# Altium PCB 项目-6层核心板.PcbDoc (part 2 of 3)
Units mil, origin at the board's own origin, x right, y up, seen from the top; angles counter-clockwise.
Board outline 2165.35 x 1574.8 mil, 6 copper layers (TOP, GND02, ART03, ART04, PWR05, BOTTOM); 172 components, 0 nets, 834 pads, 541 vias.
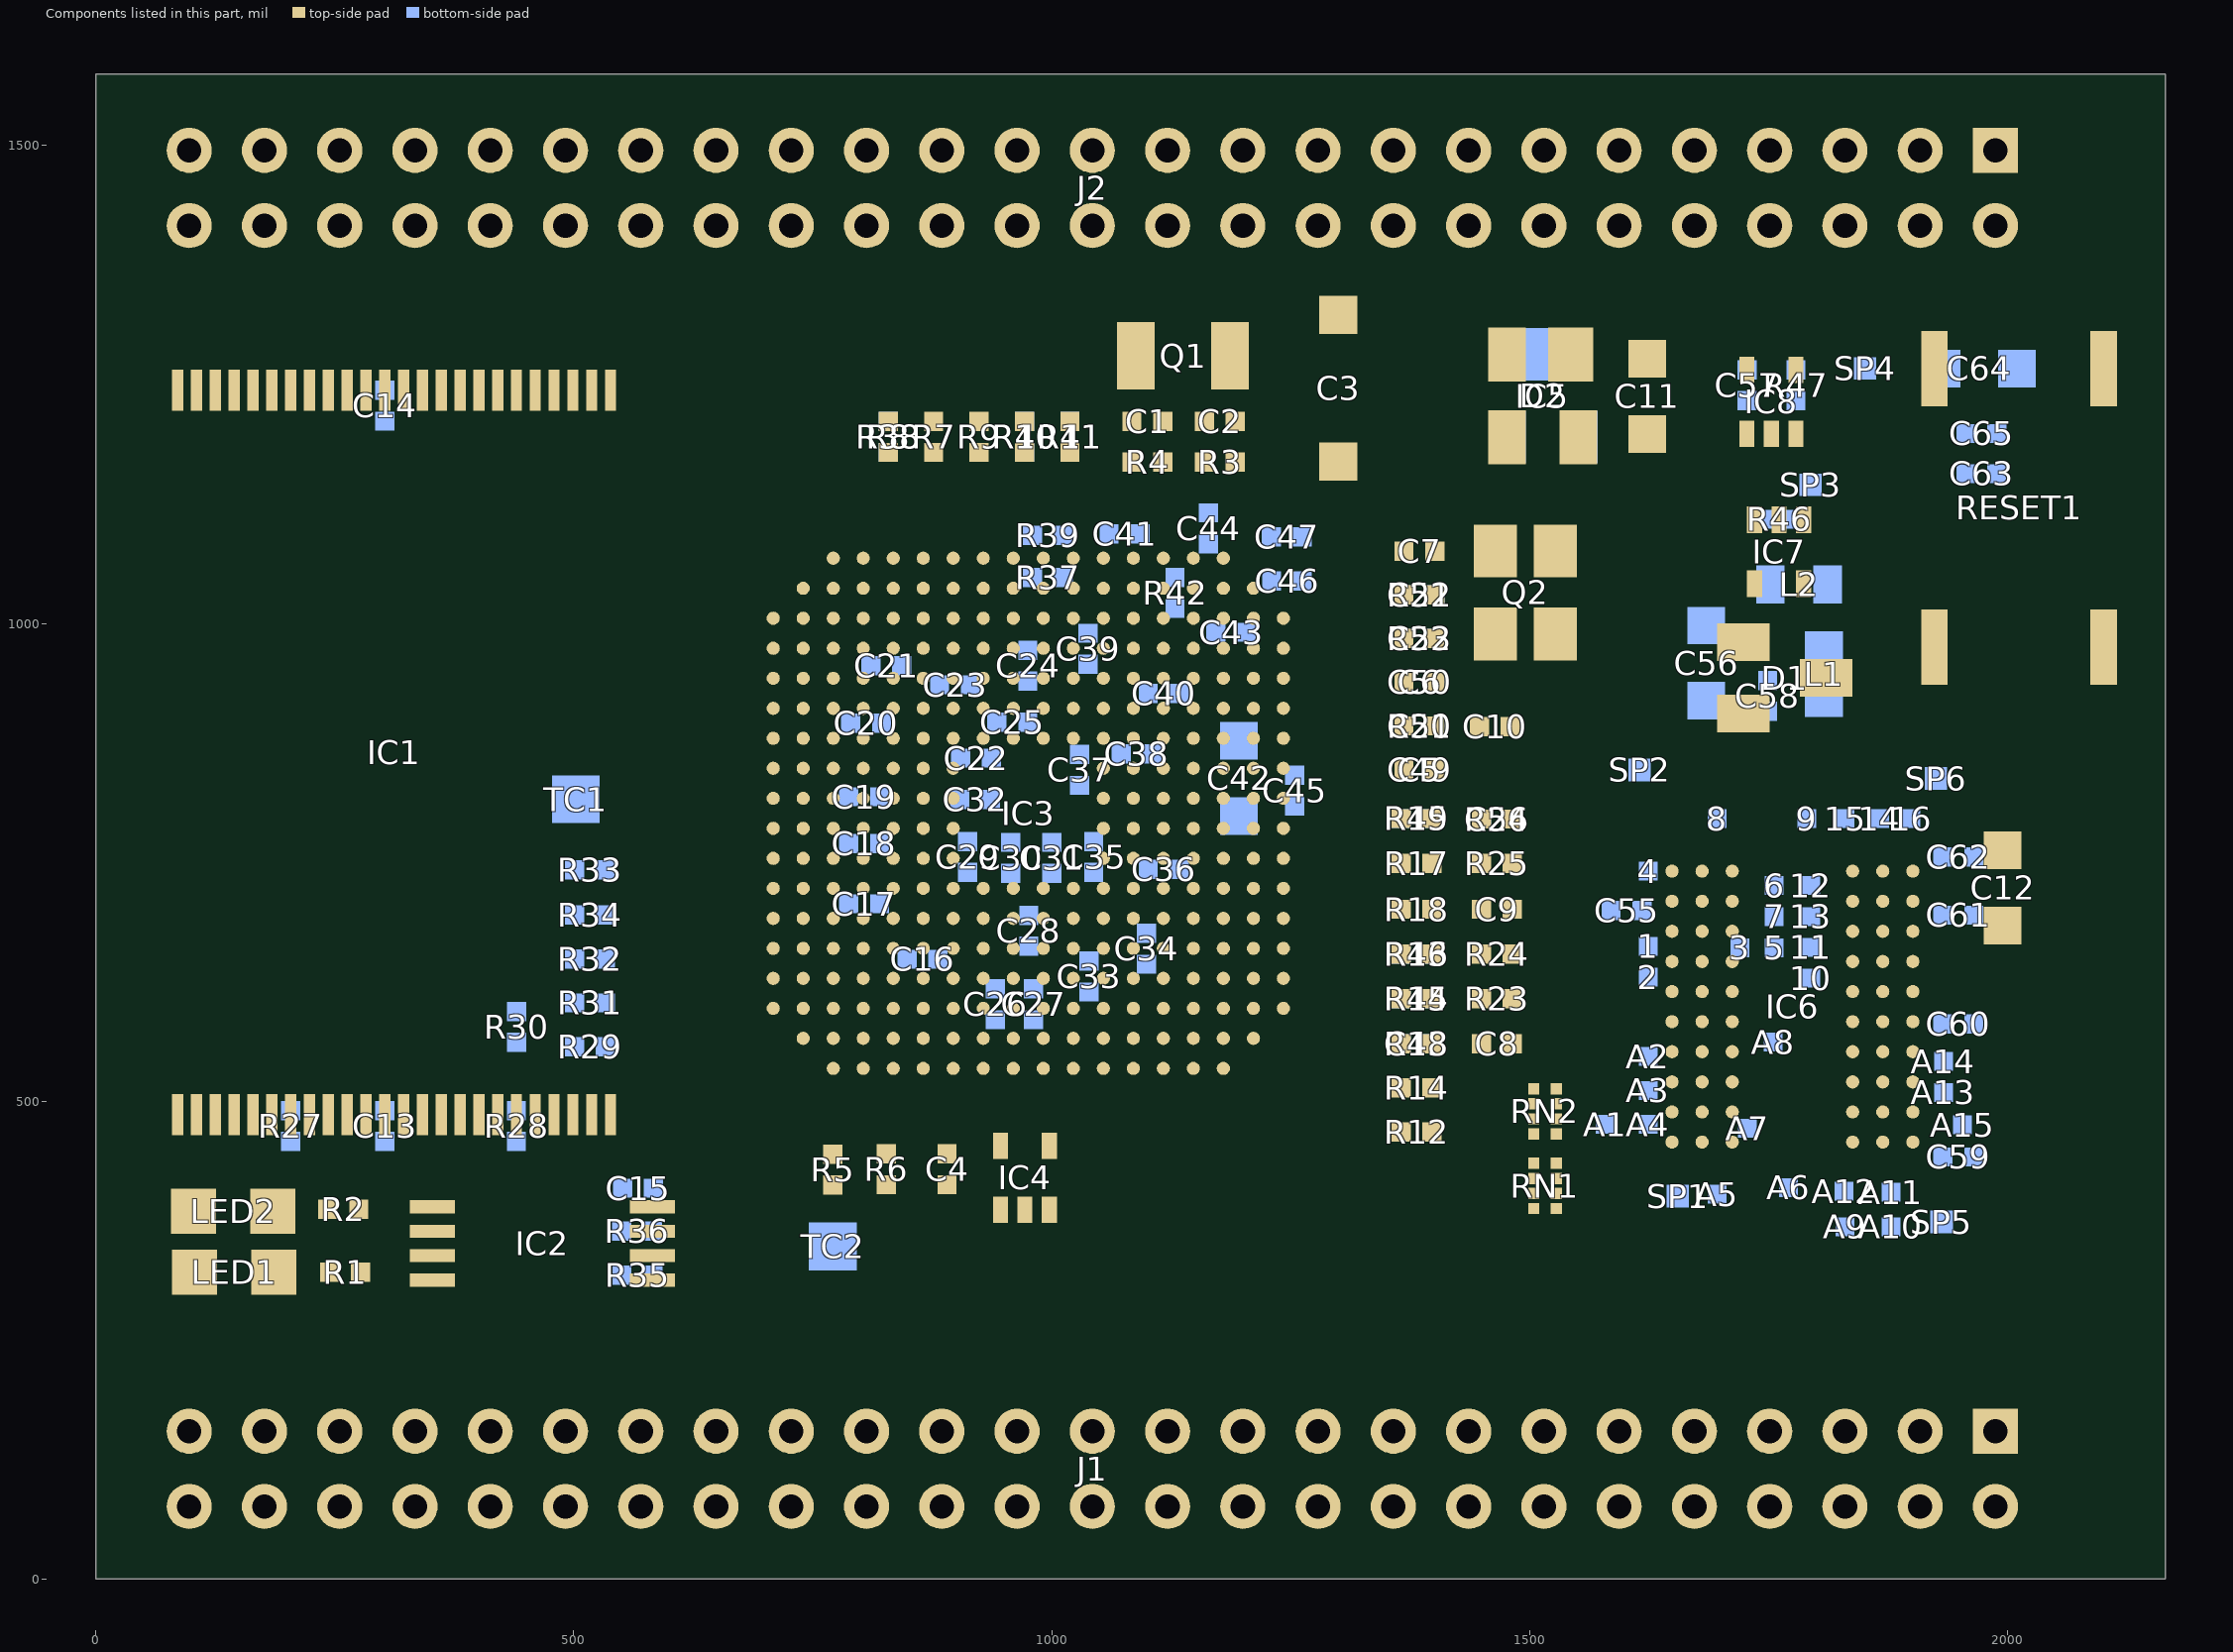
[diagram p6: the components of this part, seen from the top]

## Via types
v1: diameter 16, hole 8, TOP to BOTTOM, tented both sides, 541 vias

## Nets (pads, with @x,y where several pads share a name; then routed paths per layer and width w, separated by ;. In a path a pad name is that pad's centre, name@x,y a point inside that pad or via, vN(x,y) a via of type N, cw(c..) or ccw(c..) an arc to the next point about the centre after c; other vN are vias at no path point) (continued)
copper on no net: | length 160065.2
  TOP w5: v1(1330,664) 1337.48,671.48 1348.13,671.48 1365.56,654.06 ; v1(1330,693) 1330.48,693 1340,683.48 1348.13,683.48 1365.56,700.91 ; 1397.84,654.06 1412.79,669 v1(1423,669) ; v1(1423,700.91) 1449.56,700.91 1449.56,654.06 1449.56,607.2 1449.56,560.34
  TOP w5.7: v1(125.01,1073.73) 265.01,1073.73 400.58,1209.3 400.58,1243.94 ; v1(126.01,1120.73) 164.37,1159.09 164.37,1243.94 ; 184.05,1243.94 184.05,1204.92 v1(184.1,1204.87) ; 194,382 199,387 ; 196,326 201,321 ; v1(203.69,555.14) 223.42,535.41 223.42,486.07 ; 203.73,486.07 203.73,525.09 v1(203.78,525.14) ; 203.74,1243.94 203.74,1140 v1(223.01,1120.73) ; 223.42,1243.94 223.42,1204.92 v1(223.47,1204.87) ; 243.1,486.07 243.1,547.82 v1(285.01,589.73) ; v1(315.01,1084.87) 333.87,1103.73 352.01,1103.73 439.96,1191.68 439.96,1243.94 ; v1(316.01,1048.73) 459.64,1192.36 459.64,1243.94 ; v1(350.32,1124.87) 420.27,1194.82 420.27,1243.94 ; v1(365.01,525.73) 376.01,525.73 380.9,520.84 380.9,486.07 ; 400.58,486.07 v1(400.63,525.14) v1(400.63,525.14) ; v1(411.01,426.73) 420.27,435.99 420.27,486.07 ; 439.95,486.07 v1(440,525.14) v1(440,525.14) ; 582.31,312.82 820.69,312.82 v1@821.18,312.33 ; 582.31,338.41 v1(818.15,338.41) v1@818.24,338.5 ; 582.31,364 625.82,364 v1(626,364.18) ; v1(598.7,926.9) 614.4,942.6 708.6,942.6 ; v1(630.1,644.3) 692.9,644.3 708.6,660 ; v1(630.1,707.1) 645.8,722.8 708.6,722.8 ; v1(630.1,926.9) 692.9,926.9 708.6,911.2 ; v1(661.5,707.1) 724.3,707.1 740,722.8 ; v1(661.5,769.9) 692.9,801.3 755.7,801.3 771.4,785.6 ; v1(661.5,864.1) 677.2,879.8 708.6,879.8 ; v1@692.9,455.9 771.4,534.4 ; v1(692.9,581.5) 708.6,597.2 ; v1(692.9,612.9) 755.7,612.9 771.4,628.6 ; v1(692.9,675.7) 708.6,691.4 ; v1(692.9,769.9) 708.6,754.2 ; v1(692.9,864.1) 708.6,848.4 ; v1(692.9,989.7) 708.6,974 ; v1(692.9,1021.1) 708.6,1005.4 ; v1(724.3,455.9) 767.13,498.73 794.01,498.73 802.8,507.52 802.8,534.4 ; v1(724.3,518.7) 771.4,565.8 ; v1(724.3,581.5) 740,597.2 ; v1(724.3,675.7) 740,691.4 ; v1(724.3,738.5) 740,754.2 ; v1(724.3,769.9) 740,785.6 ; v1(724.3,832.7) 740,817 ; v1(724.3,864.1) 740,848.4 ; v1(724.3,958.3) 740,942.6 ; v1(724.3,989.7) 740,974 ; v1(724.3,1115.3) 724.3,1021.1 740,1005.4 ; v1(755.7,581.5) 771.4,597.2 ; v1(755.7,644.3) 771.4,660 ; v1(755.7,675.7) 771.4,691.4 ; v1(755.7,738.5) 771.4,754.2 ; v1(755.7,832.7) 771.4,817 ; v1(755.7,864.1) 771.4,848.4 ; v1(755.7,895.5) 771.4,879.8 ; v1(755.7,958.3) 771.4,942.6 ; v1(755.7,989.7) 771.4,974 ; v1(755.7,1021.1) 771.4,1005.4 ; v1(755.7,1115.3) 755.7,1052.5 771.4,1036.8 ; v1@755.7,1146.7 771.4,1131 771.4,1068.2 ; v1(771,385.74) 771,412.32 ; 771,444.6 v1(803.12,444.6) ; 771.4,911.2 v1(787.1,926.9) ; v1(787.1,518.7) 787.1,550.1 802.8,565.8 ; v1(787.1,581.5) 802.8,597.2 ; v1(787.1,612.9) 802.8,628.6 ; v1(787.1,644.3) 802.8,660 ; v1(787.1,675.7) 802.8,691.4 ; v1(787.1,738.5) 802.8,754.2 ; v1(787.1,864.1) 802.8,879.8 ; v1(787.1,1021.1) 802.8,1005.4 ; v1(787.1,1115.3) 787.1,1052.5 802.8,1036.8 ; v1(787.1,1151) 802.8,1135.3 802.8,1131 802.8,1068.2 ; 802.8,785.6 818.5,801.3 v1(849.9,801.3) ; v1(818.5,550.1) 834.2,565.8 ; v1(818.5,581.5) 834.2,597.2 ; v1(818.5,612.9) 834.2,628.6 ; v1(818.5,644.3) 834.2,660 ; v1(818.5,675.7) 834.2,691.4 ; v1(818.5,864.1) 834.2,848.4 ; v1(818.5,926.9) 834.2,911.2 ; v1(818.5,1021.1) 834.2,1005.4 ; v1(818.5,1052.5) 834.2,1036.8 ; v1(818.5,1083.9) 834.2,1068.2 ; 827,445 v1(827.01,476.73) ; v1(829,1151) 829,1179 ; 834.2,534.4 865.6,503 v1(897,503) ; v1(849.9,550.1) 865.6,565.8 ; v1(849.9,581.5) 865.6,597.2 ; v1(849.9,612.9) 865.6,628.6 ; v1(849.9,1021.1) 865.6,1005.4 ; v1(849.9,1052.5) 865.6,1036.8 ; v1(849.9,1083.9) 865.6,1068.2 ; 865.6,534.4 881.3,518.7 912.7,518.7 v1(928.4,503) ; v1(876.5,1151) 876.5,1179 ; 876.5,1211.28 v1(876.5,1239.28) ; v1(881.3,550.1) 897,565.8 ; v1(881.3,581.5) 897,597.2 ; v1(881.3,612.9) 897,628.6 ; v1(881.3,895.5) 897,911.2 ; v1(881.3,958.3) 897,942.6 ; v1(881.3,989.7) 897,974 ; v1(881.3,1021.1) 897,1005.4 ; v1(881.3,1115.3) 881.3,1083.9 897,1068.2 ; v1(912.7,550.1) 928.4,565.8 ; v1(912.7,581.5) 928.4,597.2 ; v1(912.7,612.9) 928.4,628.6 ; v1(912.7,958.3) 928.4,942.6 ; v1(912.7,989.7) 928.4,974 ; v1(912.7,1083.9) 912.7,1052.5 928.4,1036.8 ; v1(924,1115.3) 924,1104 928.4,1099.6 928.4,1068.2 ; v1@924,1151 v1(924,1154) 924,1179 ; 924,1211.28 v1(924,1239.28) ; v1(944.1,958.3) 959.8,942.6 ; v1(944.1,989.7) 959.8,974 ; v1(944.1,1021.1) 959.8,1005.4 ; v1(944.1,1052.5) 959.8,1036.8 ; v1(944.1,1083.9) 959.8,1068.2 ; v1@971.5,1151 v1(971.5,1154) 971.5,1179 ; 991.2,942.6 v1(1006.9,958.3) ; 991.2,974 v1(1006.9,989.7) ; 991.2,1005.4 v1(1006.9,1021.1) ; v1(1006.9,612.9) 1022.6,628.6 ; v1@1019,1151 v1(1019,1154) 1019,1179 ; 1022.6,597.2 v1(1038.3,581.5) ; 1054,534.4 v1(1069.7,518.7) ; 1054,565.8 v1(1069.7,550.1) ; 1054,597.2 v1(1069.7,581.5) ; 1054,628.6 v1(1069.7,612.9) ; 1054,942.6 1069.7,958.3 v1(1069.7,989.7) ; 1054,1005.4 v1(1069.7,1021.1) ; v1(1069.7,1052.5) 1085.4,1036.8 ; 1083.86,1169 1083.86,1211.28 1088.15,1215.58 1088.15,1280 1088.15,1263.15 ; 1085.4,534.4 v1(1101.1,518.7) ; 1085.4,565.8 v1(1101.1,550.1) ; 1085.4,597.2 v1(1101.1,581.5) ; 1085.4,628.6 v1(1101.1,612.9) ; 1085.4,942.6 v1(1101.1,958.3) ; 1085.4,1005.4 v1(1101.1,1021.1) ; 1116.14,1169 1130,1155.14 1130,1128 1101.1,1099.1 1101.1,1052.5 1116.8,1036.8 ; 1116.8,534.4 v1(1132.5,518.7) ; 1116.8,565.8 v1(1132.5,550.1) ; 1116.8,597.2 v1(1132.5,581.5) ; 1116.8,628.6 v1(1132.5,612.9) ; 1116.8,1005.4 1132.5,1021.1 1132.5,1081.5 1148,1097 1148,1157.14 1159.86,1169 ; v1(1132.5,675.7) 1148.2,691.4 ; 1148.2,534.4 v1(1163.9,518.7) ; 1148.2,565.8 v1(1163.9,550.1) ; 1148.2,597.2 v1(1163.9,581.5) ; 1148.2,628.6 v1(1163.9,612.9) ; 1148.2,660 v1(1163.9,644.3) ; 1148.2,722.8 v1(1163.9,707.1) ; 1148.2,754.2 v1(1163.9,738.5) ; 1148.2,785.6 1163.9,801.3 v1@1336.01,801.3 ; 1148.2,911.2 v1(1163.9,926.9) ; 1148.2,942.6 v1(1163.9,958.3) ; 1148.2,974 1163.9,989.7 1362.97,989.7 1368.5,984.17 ; v1(1163.9,675.7) 1179.6,660 ; 1179.6,565.8 v1(1195.3,550.1) ; 1179.6,597.2 v1(1195.3,612.9) ; 1179.6,691.4 v1(1195.3,675.7) ; 1179.6,722.8 v1(1195.3,707.1) ; 1179.6,754.2 v1(1195.3,738.5) ; 1179.6,942.6 v1(1195.3,926.9) ; 1179.6,1036.8 1200.8,1058 1251,1058 1305,1004 1342.6,1004 1368.5,1029.9 ; 1186.58,1280 1192.14,1274.44 1192.14,1211.28 1192.14,1169.23 ; 1192.14,1169 1192.14,1169.23 ; 1211.01,597.2 1220.54,597.2 1242.42,575.32 1242.42,488.58 1263.12,467.88 1365.56,467.88 ; 1211.01,628.6 v1(1226.71,612.9) ; 1211.01,660 v1(1226.71,644.3) ; 1211.01,691.4 v1(1226.71,675.7) ; 1211.01,722.8 v1(1226.71,707.1) ; 1211.01,754.2 v1(1226.71,738.5) ; 1211.01,974 v1(1226.71,958.3) ; 1211.01,1005.4 v1(1226.71,1021.1) ; v1(1226.98,770.18) 1242.4,785.6 1242.68,785.88 ; 1242.4,597.2 v1(1258.1,581.5) ; 1242.4,628.6 1288.14,628.6 1296.01,620.73 1296.01,593.73 1292.01,589.73 1284.01,589.73 1278.01,595.73 1278.01,605.73 1270.84,612.9 v1(1258.1,612.9) ; 1242.4,660 v1(1258.1,644.3) ; 1242.4,691.4 v1(1258.1,675.7) ; 1242.4,722.8 v1(1258.1,707.1) ; 1242.4,754.2 1276.55,720.05 1276.55,673.19 1315.01,634.73 1315.01,540.99 1342.12,513.88 1365.56,513.88 ; 1242.4,1005.4 v1(1258.1,1021.1) ; 1300,1169.23 1192.14,1169.23 ; v1(1339,893) 1339.28,892.72 1368.5,892.72 1368.5,847 ; 1365.56,560.34 1365.56,607.2 ; 1365.56,748.97 1365.56,795.83 ; 1397.84,467.88 1427.39,497.43 v1(1427.39,514.01) ; 1397.84,513.88 1397.84,560.34 v1(1397.84,583.73) ; 1397.84,607.2 v1(1420.88,630.24) ; 1397.84,700.91 v1(1423,700.91) ; 1397.84,748.97 v1(1424.01,748.97) 1447.82,748.97 ; 1397.84,795.83 1448.96,795.83 ; 1400.78,892.72 1446.83,892.72 1447.56,892 ; 1400.78,938.45 1400.78,985.78 1427,1012 1427,1022 1439,1034 1488,1034 1527,995 1527,989.01 ; 1400.78,1029.9 1400.78,1075.62 1464.01,1075.62 ; v1@1427.26,513.88 v1(1427.39,514.01) ; v1@1428.11,514.73 v1(1427.39,514.01) ; 1449.56,795.23 v1@1449.56,822.18 ; v1(1456.01,403.3) 1471.49,387.82 1504.34,387.82 ; v1(1456.01,434.79) 1471.49,419.31 1504.34,419.31 ; 1476.2,1281.31 1476.2,1320.2 1484,1328 v1(1514,1328) ; 1481.84,747.23 1481.84,748.97 1481.84,723.9 1486.01,719.73 1525.01,719.73 1535.01,709.73 1535.01,662.7 1530.59,658.28 1507.43,658.28 1503.01,653.86 1503.01,645.01 1507.43,640.58 1530.59,640.58 1535.01,636.16 1535.01,597.73 1547.01,585.73 1564.01,585.73 1574.01,595.73 1574.01,612.16 1569.59,616.58 1558.43,616.58 1554.01,621.01 1554.01,629.86 1558.43,634.28 1569.59,634.28 1574.01,638.7 1574.01,647.55 1569.59,651.98 1558.43,651.98 1554.01,656.41 1554.01,665.26 1558.43,669.68 1569.59,669.68 1574.01,674.11 1574.01,682.95 1569.59,687.38 1558.43,687.38 1554.01,691.8 1554.01,700.66 1558.43,705.08 1569.59,705.08 1574.01,709.51 1574.01,724.16 1569.59,728.58 1538.43,728.58 1534.01,733.01 1534.01,741.86 1538.43,746.28 1569.59,746.28 1574.01,750.7 1574.01,762.55 1569.59,766.98 ; 1481.84,795.23 1468.01,809.06 1468.01,837.73 1476.01,845.73 1502.03,845.73 1506.46,841.3 1506.46,804.16 1510.89,799.73 1519.74,799.73 1524.16,804.16 1524.16,841.3 1528.59,845.73 1541.01,845.73 1549.01,837.73 1549.01,817.73 1567.01,799.73 1567.01,792.73 1558.96,784.68 1508.43,784.68 1504.01,780.26 1504.01,771.41 1508.43,766.98 1569.59,766.98 ; v1(1484.01,403.3) 1484.28,403.57 1504.34,403.57 ; v1(1484.01,434.79) 1484.28,435.06 1504.34,435.06 ; v1(1484.01,468.01) 1484.01,489.73 1491.59,497.31 1504.34,497.31 ; v1@1484.28,513.06 1504.34,513.06 ; 1527.96,387.82 1560.81,387.82 v1(1576.29,403.3) ; 1527.96,403.57 v1@1548.02,403.57 ; 1527.96,419.31 1560.81,419.31 v1(1576.29,434.79) ; 1527.96,435.06 v1@1548.02,435.06 ; 1527.96,497.31 1580.59,497.31 1595.01,511.73 1595.01,548.84 v1(1576.29,567.56) ; 1527.96,513.06 1542.01,513.06 1548.02,519.07 1548.02,567.29 v1(1548.29,567.56) ; 1538.43,766.98 1569.59,766.98 ; v1(1566.01,822.73) 1587.01,801.73 1587.01,759.3 1591.43,754.88 1596.59,754.88 1601.01,750.45 1601.01,741.61 1596.59,737.18 1591.43,737.18 1587.01,732.76 1587.01,636.73 1626.01,597.73 1663.44,597.73 1680.51,614.8 ; 1649.01,488.82 v1(1664.76,473.07) ; 1649.01,520.32 1638.6,530.73 1627.01,530.73 1622.01,525.73 1622.01,507.73 1626.01,503.73 1663.92,503.73 v1(1664.76,504.57) ; 1649.01,551.81 v1(1664.76,536.06) ; v1(1664.76,630.55) 1680.51,646.3 ; 1680.51,457.32 v1(1696.26,441.57) ; 1680.51,488.82 v1(1696.26,473.07) ; 1680.51,520.32 v1(1696.26,504.57) ; 1680.51,551.81 v1(1696.26,536.06) ; 1680.51,583.31 v1(1696.26,567.56) ; 1680.51,677.8 1670.08,677.8 1664.01,671.73 1664.01,664.73 1668.01,660.73 1691.01,660.73 1696.26,665.98 v1(1696.26,693.54) ; 1680.51,709.29 v1(1696.26,725.03) ; 1680.51,740.79 1680.51,766.23 1673.01,773.73 1615.01,773.73 1609.01,779.73 1609.01,809.73 1616.01,816.73 1631.64,816.73 1636.06,812.3 1636.06,796.18 1640.49,791.76 1649.34,791.76 1653.76,796.18 1653.76,812.3 1658.18,816.73 1667.03,816.73 1671.46,812.3 1671.46,796.18 1675.89,791.76 1684.74,791.76 1689.16,796.18 1689.16,812.3 1693.59,816.73 1698.01,816.73 1704.01,816.73 1711.01,809.73 1711.01,771.29 v1(1696.26,756.53) ; 1712.01,457.32 1712.01,430.73 1706.01,424.73 1691.01,424.73 1684.01,417.73 1684.01,383.73 1689.01,378.73 1709.43,378.73 1713.86,383.16 1713.86,408.3 1718.28,412.73 1727.14,412.73 1731.56,408.3 1731.56,383.16 1735.99,378.73 1750.01,378.73 1754.01,382.73 1754.01,427.73 1740.17,441.57 v1(1727.76,441.57) ; 1712.01,488.82 1719.05,481.77 ; 1712.01,520.32 v1(1727.76,504.57) ; 1712.01,551.81 v1(1727.76,536.06) ; 1712.01,614.8 1712.01,604.73 1720.01,596.73 1745.01,596.73 1754.01,587.73 1754.01,580.73 1748.01,574.73 1734.01,574.73 1729.01,569.73 1729.01,560.73 1735.01,554.73 1770.01,554.73 1776.01,560.73 1776.01,604.73 1768.23,612.51 1745.79,612.51 v1(1727.76,630.54) ; 1712.01,646.3 1743.51,646.3 v1(1759.26,630.54) ; 1712.01,677.8 v1(1727.76,693.54) ; 1712.01,709.29 v1(1727.76,725.03) ; 1727.41,1198.53 1728.01,1197.93 v1(1728.01,1162.73) ; 1727.76,473.07 1719.05,481.77 ; v1@1734,1071.01 1734,1042.95 1735.41,1041.54 ; v1@1771.01,389.73 1771.01,429.82 1719.05,481.77 ; 1778.59,1265.46 1778.59,1298.59 v1(1779,1299) ; 1786.59,1108.47 v1(1857.01,1108.47) 1899.53,1108.47 1923.42,1084.58 1923.42,975.33 2100.58,975.33 ; v1(1790.74,756.53) 1804.01,743.27 1804.01,721.11 1799.59,716.68 1794.9,716.68 1790.48,712.26 1790.48,703.41 1794.9,698.98 1799.59,698.98 1804.01,694.55 1804.01,685.7 1799.59,681.28 1794.9,681.28 1790.48,676.86 1790.48,668.01 1794.9,663.58 1799.59,663.58 1804.01,659.16 1804.01,622.73 1811.94,614.8 1837.99,614.8 ; v1(1822.24,441.57) 1819.85,441.57 1806.01,427.73 1806.01,417.73 1815.01,408.73 1833.01,408.73 1837.99,413.71 1837.99,457.32 ; v1(1822.24,473.07) 1801.9,452.73 1787.01,452.73 1775.01,464.73 1775.01,482.73 1781.1,488.82 1837.99,488.82 ; v1(1822.24,504.57) 1837.99,520.32 ; v1(1822.24,536.06) 1837.99,551.81 ; v1(1822.24,662.04) 1837.99,646.3 ; v1(1822.24,693.54) 1837.99,677.8 ; v1(1822.24,725.03) 1837.99,709.29 ; v1(1853.74,441.57) 1869.49,457.32 ; v1(1853.74,473.07) 1869.49,488.82 ; v1(1853.74,504.57) 1869.49,520.32 ; v1(1853.74,536.06) 1869.49,551.81 ; v1(1853.74,567.56) 1869.49,583.31 ; v1(1853.74,630.54) 1869.49,614.8 ; v1(1853.74,662.04) 1869.49,646.3 ; v1(1853.74,693.54) 1869.49,677.8 ; v1(1853.74,725.03) 1869.49,709.29 ; 1869.49,740.79 v1(1885.24,725.04) ; v1(1885.23,504.57) 1900.98,520.32 ; v1(1885.23,536.06) 1900.98,551.81 ; 1900.98,488.82 v1(1916.73,473.07)
  TOP w10: v1@102,429 v1(102.32,428.68) 102.32,385 103.32,384 103.32,321 v1(103.32,272.68) v1@104,272 ; v1@274,357 v1(275,358) 275,387 ; v1(277,292) 277,321 ; v1(285,524.14) 297,524.14 302.16,518.98 302.16,486.07 ; 302.16,1243.94 302.16,1284.16 v1(303,1285) ; v1(302.43,426.14) 321.84,445.55 321.84,486.07 ; 321.84,1243.94 321.84,1273.84 v1(334,1286) ; 352,312.82 v1(394,312.82) 394,331.82 387.41,338.41 352,338.41 ; 352,364 v1(394,364) 394,383 387.41,389.59 352,389.59 ; 582.31,389.59 613.59,389.59 v1(626,402) ; v1(801,1211) 801.28,1211.28 829,1211.28 ; 827,412.72 v1(856.01,412.72) 890.49,412.72 892.5,414.73 991.01,414.73 997.59,408.15 997.59,386.53 ; 890.49,445 937.95,445 946.41,453.46 ; v1@972,1240 v1(971.5,1239.5) 971.5,1211.28 1019,1211.28 ; 1083.01,1091.73 1083.01,1125.99 v1(1055,1154) v1(1055,1270.73) 1055,1325 1069,1339 1210,1339 1223,1326 v1(1223,1271) v1(1223,1216) ; 1116.14,1211.28 1159.86,1211.28 ; 1116.8,1068.2 1116.8,1090.8 v1(1117,1091) ; 1148.2,1068.2 1165,1085 1165,1109 ; v1(1223,1196) v1(1223,1216) ; v1(1265,974) v1(1313,974) 1332.95,974 1368.5,938.45 1368.5,933.5 1385,917 1449,917 v1(1464.01,932.01) ; v1(1300,1279) 1300,1322.77 ; 1400.78,847 v1(1430,847) ; v1@1435,1194 v1(1435.69,1194.69) 1476.2,1194.69 ; 1464.01,989.01 v1(1464.01,932.01) ; v1(1476.89,1153.49) 1476.2,1154.18 1476.2,1194.69 ; 1479.84,892 v1(1512,892) ; 1481.84,560.34 1481.84,607.2 ; 1481.84,654.06 1481.84,700.91 1517.88,700.91 v1(1518.01,700.79) ; 1543.13,1281.31 1555,1293.18 v1(1555,1328) ; 1551,1194.69 1476.2,1194.69 ; 1648.41,614.2 1649.01,614.8 1630.94,614.8 1607.01,638.73 1607.01,698.79 1649.01,740.79 v1(1664.76,756.53) ; 1649.01,457.32 v1(1664.76,441.57) ; 1649.01,583.31 v1(1664.76,567.56) ; 1649.01,646.3 1634.44,646.3 1625.01,655.73 1625.01,684.73 1649.01,708.73 1649.01,709.29 v1(1664.76,725.03) ; 1649.01,677.8 v1(1664.76,693.54) ; 1712.01,740.79 v1(1727.76,756.53) ; 1727.41,1265.46 v1(1727.41,1298.41) v1@1728,1299 ; 1753,1198.53 1778.59,1198.53 v1(1811.53,1198.53) v1@1812,1199 ; 1761,1108.47 v1(1761,1145) ; v1(1822.24,756.53) 1837.99,740.79 ; v1(1885.23,473.06) 1900.98,457.32 ; v1(1885.23,567.56) 1900.98,583.31 ; v1(1885.23,630.54) 1900.98,614.8 ; v1(1885.23,662.04) 1900.98,646.3 ; v1(1885.23,693.54) 1900.98,677.8 ; v1(1885.23,756.53) 1900.98,740.79 ; 1900.98,709.29 v1(1916.73,725.03) ; 1923.42,1266.67 1961.67,1266.67 v1(1962,1267) ; 1165,1109 1165,1131 v1(1174,1140) 1230,1140 1239,1131 1329,1131 1347,1149 1347,1195 v1(1326,1216) v1(1223,1216) ; 1165,1109 1202,1109 1236,1075 1261,1075 1308,1028 v1(1308,1026) 1337,1026 v1(1339,1028) v1(1339,1075.62) 1368.5,1075.62 1368.5,1104.5 v1(1392,1128) v1(1509,1128) 1527,1110 1527,1075.62 1527.38,1076 v1(1573,1076) 1573,958 1547.01,932.01 v1(1464.01,932.01)
  TOP w12: 1085.4,879.8 v1(1101.1,895.5) 1085.4,911.2
  TOP w13.78: v1(849.9,707.1) 865.6,722.8 v1(849.9,738.5) 865.6,754.2 v1(849.9,769.9) 865.6,785.6 ; v1(849.9,895.5) 865.6,879.8 v1(849.9,864.1) 865.6,848.4 v1(849.9,832.7) 865.6,817 881.3,801.3 897,817 ; v1(849.9,926.9) 865.6,911.2 ; 865.6,660 v1(849.9,675.7) 865.6,691.4 ; v1(881.3,675.7) 897,660 912.7,644.3 928.4,660 ; v1(881.3,707.1) 897,722.8 ; v1(881.3,738.5) 897,754.2 ; v1(881.3,769.9) 897,785.6 ; v1(881.3,832.7) 897,848.4 ; 897,691.4 v1(912.7,675.7) 928.4,691.4 944.1,675.7 959.8,660 v1(944.1,644.3) ; 897,879.8 v1(912.7,895.5) 928.4,879.8 ; v1(912.7,707.1) 928.4,722.8 ; 928.4,911.2 v1(944.1,926.9) 959.8,911.2 ; v1(944.1,707.1) 959.8,722.8 ; 959.8,691.4 974.71,706.31 ; 959.8,879.8 v1(975.5,864.1) ; 991.2,660 v1(1006.9,644.3) 1022.6,660 ; 991.2,879.8 v1(1006.9,895.5) 991.2,911.2 v1(1006.9,926.9) 1022.6,942.6 ; 1022.6,722.8 v1(1038.3,707.1) ; 1022.6,879.8 v1(1038.3,895.5) 1054,911.2 v1(1069.7,926.9) ; 1022.6,911.2 v1(1038.3,926.9) ; 1054,660 v1(1069.7,644.3) 1085.4,660 ; 1054,722.8 v1(1069.7,707.1) ; 1054,754.2 v1(1069.7,738.5) ; 1054,817 v1(1069.7,801.3) 1054,785.6 v1(1069.7,769.9) ; 1054,848.4 v1(1069.7,832.7) ; 1054,879.8 v1(1069.7,895.5) ; v1(1069.7,675.7) 1054,691.4 v1(1038.3,675.7) 1022.6,691.4 ; 1085.4,691.4 v1(1101.1,707.1) ; 1085.4,722.8 v1(1069.7,738.5) ; 1085.4,785.6 v1(1101.1,769.9) 1085.4,754.2 v1(1069.7,738.5) ; 1085.4,817 v1(1101.1,832.7) 1085.4,848.4 ; 1085.4,974 v1(1101.1,989.7) ; 1116.8,754.2 v1(1132.5,769.9) 1116.8,785.6 ; 1116.8,817 v1(1132.5,832.7) 1116.8,848.4 ; 1116.8,942.6 v1(1132.5,958.3) ; 1116.8,974 v1(1132.5,989.7) ; 1148.2,1005.4 v1(1163.9,1021.1) ; 1148.2,1036.8 v1(1163.9,1052.5) ; 1179.6,974 v1(1195.3,958.3) ; 1179.6,1005.4 v1(1195.3,1021.1) ; 1179.6,1068.2 v1(1195.3,1083.9) ; 1481.84,607.2 1488.84,614.2 v1(1518.6,614.2) ; 1543.13,1281.31 1623.01,1281.31 1623.01,1277 ; 1995.01,683.99 2001.75,690.73 v1(2033.01,690.73) ; v1(1995.01,809.73) 1995.01,762.73 v1(2042.01,762.73) ; v1(2084.01,1333.73) 2100.58,1317.16 2100.58,1266.67 ; 974.71,706.31 976.29,706.31 991.2,691.4 v1(1006.9,675.7) 1022.6,691.4 ; 974.71,706.31 991.2,722.8 v1(1006.9,707.1) 1022.6,691.4 ; v1(1101.1,707.1) 1116.8,722.8 v1(1132.5,707.1) 1116.8,691.4 v1(1101.1,707.1)
  TOP w15: 199,387 242.72,387 ; 201,321 244.72,321 ; 1116.8,911.2 v1(1132.5,895.5)
  ART03 w6.2: 95.01,161.73 95.01,157.33 60.01,192.33 60.01,685.73 506.01,1131.73 828.01,1131.73 894.01,1065.73 925.93,1065.73 v1(944.1,1083.9) ; 176.34,76 138.01,114.33 138.01,195.73 78.01,255.73 78.01,681.73 495.88,1099.6 834.2,1099.6 v1(849.9,1083.9) ; 176.34,154.74 176.34,236.4 121.81,290.93 121.81,703.53 502.18,1083.9 v1(818.5,1083.9) ; v1(227.01,643.73) 227.01,627.73 235.01,619.73 235.01,333.99 v1(277,292) ; 254.01,80.73 254.01,77.07 215.01,116.07 215.01,165.73 215.01,230.73 136.98,308.76 136.98,691.24 513.94,1068.2 867.54,1068.2 883.24,1052.5 v1(944.1,1052.5) ; 255.08,154.74 255.08,186.73 255.08,213.66 153.21,315.53 153.21,684.51 521.2,1052.5 v1(818.5,1052.5) ; 333.82,76 298.01,111.81 298.01,197.73 168.98,326.76 168.98,674.78 530.93,1036.73 834.13,1036.73 v1(849.9,1052.5) ; 333.82,154.74 333.82,195.92 221.01,308.73 221.01,611.73 207.01,625.73 207.01,685.81 526.6,1005.4 865.6,1005.4 v1(881.3,1021.1) ; 412.56,76 373.01,115.55 373.01,224.73 250.01,347.73 250.01,705.73 518.28,974 897,974 v1(912.7,989.7) ; 412.56,154.74 412.56,221.18 300.01,333.73 300.01,361.73 265.98,395.76 265.98,698.89 524.82,957.73 671.01,957.73 689.01,939.73 737.13,939.73 v1(755.7,958.3) ; 468.01,649.73 460.93,656.81 ; 487.21,485.65 487.21,503.73 ; 487.21,704.73 487.21,698.73 ; 491.3,154.74 463.51,182.53 463.51,193.23 322.01,334.73 322.01,436.73 304.01,454.73 304.01,710.85 520.06,926.9 v1(598.7,926.9) ; 502.81,494.04 502.81,507.73 ; 502.81,698.73 502.81,692.73 ; 570.04,76 535.01,111.03 535.01,168.73 500.01,203.73 475.01,203.73 340.01,338.73 340.01,445.73 318.01,467.73 318.01,699.16 527.58,908.73 709.01,908.73 726.88,926.6 756.88,926.6 772.88,942.6 928.4,942.6 v1(944.1,958.3) ; 570.04,154.74 570.04,167.7 408.01,329.73 380.01,329.73 356.1,353.64 356.1,458.82 334.01,480.92 334.01,693.94 533.8,893.73 726.01,893.73 743.48,911.2 953.48,911.2 973.01,930.73 973.01,955.81 v1(1006.9,989.7) ; v1(630.1,644.3) 630.1,556.64 675.01,511.73 701.01,511.73 745.01,467.73 745.01,434.73 805.51,374.23 805.51,351.23 863.41,293.33 903.89,293.33 1042.48,154.74 ; v1(630.1,707.1) 598.48,707.1 565.21,673.83 565.21,517.53 667.01,415.73 667.01,399.73 870.01,196.73 894.01,196.73 917.01,173.73 917.01,119.73 928.01,108.73 982.01,108.73 1014.74,76 1042.48,76 ; 648.78,76 611.01,113.77 611.01,170.73 582.01,199.73 561.01,199.73 415.01,345.73 385.01,345.73 368.71,362.03 368.71,467.43 347.01,489.13 347.01,685.73 541.08,879.8 865.6,879.8 v1(881.3,895.5) ; 648.78,154.74 648.78,178.96 609.01,218.73 565.01,218.73 470.01,313.73 470.01,426.73 423.01,473.73 423.01,631.73 406.01,648.73 406.01,716.73 537.68,848.4 863.01,848.4 890.34,875.73 944.01,875.73 979.48,911.2 1014.07,911.2 1022.6,919.73 1022.6,1005.4 v1(1006.9,1021.1) ; v1(661.5,707.1) 644.13,689.73 602.85,689.73 580.81,667.69 580.81,519.93 684.01,416.73 684.01,405.73 876.01,213.73 904.75,213.73 930.01,188.47 930.01,132.73 941.01,121.73 992.01,121.73 1006.01,107.73 1060.01,107.73 1091.74,76 1121.22,76 ; v1(661.5,769.9) 567.18,769.9 502.81,705.53 502.81,692.73 ; v1(692.9,581.5) 708.6,597.2 794.54,597.2 802.8,588.94 802.8,523.94 866.01,460.73 866.01,426.73 877.01,415.73 877.01,390.73 1051.51,216.23 1063.01,216.23 ; v1(692.9,612.9) 674.01,594.01 674.01,566.73 690.01,550.73 745.01,550.73 771.01,524.73 771.01,507.73 838.01,440.73 838.01,403.73 1039.76,201.98 1073.98,201.98 1085.01,190.96 ; v1(692.9,675.7) 610.98,675.7 596.41,661.13 596.41,527.33 699.01,424.73 699.01,411.73 865.01,245.73 894.01,245.73 950.01,189.73 950.01,168.47 963.74,154.74 ; v1(692.9,769.9) 675.73,752.73 572.01,752.73 518.41,699.13 518.41,500.33 588.01,430.73 588.01,354.73 617.01,325.73 670.01,325.73 806.26,189.48 806.26,154.74 ; v1(724.3,675.7) 708.6,660 622.28,660 612.01,649.73 612.01,548.73 668.01,492.73 684.01,492.73 708.01,468.73 708.01,441.73 739.81,409.93 739.81,393.69 v1(821.41,312.1) 870.77,262.73 908.01,262.73 1004.01,166.73 1004.01,141.73 1025.01,120.73 1072.01,120.73 1084.01,108.73 1167.23,108.73 1199.96,76 ; v1(724.3,738.5) 708.53,722.73 592.01,722.73 549.61,680.33 549.61,512.13 649.01,412.73 649.01,395.73 885,159.74 885,154.74 ; v1(724.3,769.9) 708.47,785.73 563.01,785.73 487.21,709.93 487.21,698.73 ; v1(724.3,832.7) 547.48,832.7 424.04,709.26 424.04,658.73 456.01,626.76 456.01,464.73 484.01,436.73 484.01,326.73 575.01,235.73 633.01,235.73 690.01,178.73 690.01,113.51 727.52,76 ; 727.52,154.74 727.52,183.22 634.01,276.73 581.01,276.73 538.01,319.73 538.01,372.73 501.51,409.23 501.51,443.23 471.61,473.13 471.61,646.13 460.93,656.81 ; v1(755.7,644.3) 698.58,644.3 658.01,603.73 658.01,557.73 680.01,535.73 735.01,535.73 755.01,515.73 755.01,489.73 769.01,475.73 769.01,451.73 1033.01,187.73 1064.01,187.73 1080.01,171.73 1080.01,136.73 1095.01,121.73 1232.97,121.73 1278.7,76 ; v1(755.7,738.5) 740,754.2 709.48,754.2 693.01,737.73 586.01,737.73 534.01,685.73 534.01,503.73 605.01,432.73 605.01,358.73 621.01,342.73 678.01,342.73 827.01,193.73 827.01,181.73 843.01,165.73 843.01,130.73 861.01,112.73 893.01,112.73 929.74,76 963.74,76 ; v1(755.7,832.7) 736.73,813.73 555.34,813.73 443.01,701.4 443.01,674.73 460.93,656.81 ; v1(787.1,644.3) 802.8,628.6 859.14,628.6 865.6,622.14 865.6,510.73 905.01,471.32 905.01,408.73 1069.01,244.73 1236.01,244.73 1318.01,162.73 1318.01,115.43 1357.44,76 ; v1(787.1,675.7) 802.8,691.4 954.34,691.4 980.01,665.73 980.01,428.73 1107.01,301.73 1293.01,301.73 1339.01,255.73 1524.01,255.73 1575.01,204.73 1607.01,204.73 1639.01,172.73 1639.01,109.73 1672.4,76.34 1672.4,76 ; 806.26,76 760.01,122.25 760.01,186.73 653.01,293.73 597.01,293.73 555.01,335.73 555.01,378.73 521.01,412.73 521.01,446.65 487.21,480.45 487.21,503.73 ; v1(818.5,612.9) 834.2,597.2 834.2,514.54 890.01,458.73 890.01,400.73 1060.26,230.48 1096.01,230.48 ; v1(818.5,644.3) 903.44,644.3 951.01,596.73 951.01,415.73 1093.51,273.23 1149.01,273.23 ; v1(818.5,675.7) 835.47,658.73 907.01,658.73 965.01,600.73 965.01,422.73 1100.26,287.48 1285.26,287.48 1335.01,237.73 1511.01,237.73 1555.01,193.73 1555.01,114.65 1593.66,76 ; v1(876.5,1239.28) 876.5,1410.22 880.01,1413.73 ; v1(881.3,612.9) 897,597.2 897,539.73 912.7,524.03 912.7,489.04 939.01,462.73 939.01,399.73 1079.76,258.98 1253.2,258.98 1315.23,196.95 1393.97,196.95 1436.18,154.74 ; v1(881.3,1115.3) 858.01,1138.59 858.01,1372.73 841.01,1389.73 841.01,1451.01 885,1495 ; 885,76 861.8,99.2 841.54,99.2 825.01,115.73 788.01,115.73 773.01,130.73 773.01,196.73 659.01,310.73 605.01,310.73 571.01,344.73 571.01,390.73 534.01,427.73 534.01,456.04 502.81,487.24 502.81,507.73 ; v1(912.7,958.3) 928.4,974 955.28,974 982.01,1000.73 982.01,1108.73 954.01,1136.73 954.01,1174.73 996.01,1216.73 996.01,1321.73 1013.01,1338.73 1496.01,1338.73 1553.01,1395.73 1553.01,1457.73 1512.01,1498.73 ; v1(912.7,1083.9) 902.01,1094.59 902.01,1243.73 945.01,1286.73 945.01,1356.73 971.01,1382.73 1402.65,1382.73 1436.18,1416.26 ; v1(924,1239.28) 960.51,1275.79 960.51,1340.23 989.01,1368.73 1446.01,1368.73 1476.01,1398.73 1476.01,1453.73 1435.46,1494.28 ; v1(944.1,1021.1) 964.01,1041.01 964.01,1095.73 941.01,1118.73 941.01,1186.73 952.01,1197.73 952.01,1246.73 981.82,1276.54 981.82,1329.54 1005.01,1352.73 1451.39,1352.73 1514.92,1416.26 ; v1(971.5,1154) 1004.01,1121.49 1004.01,1056.73 1023.94,1036.8 1085.4,1036.8 v1(1101.1,1021.1) ; v1(1019,1154) 1019,1072.74 1039.24,1052.5 v1(1069.7,1052.5) ; v1(1069.7,581.5) 1052.01,563.81 1052.01,496.73 1089.74,459 1323.74,459 1336.28,446.46 1336.28,440.02 1325.75,429.49 1325.75,423.05 1332.18,416.62 1338.62,416.62 1349.15,427.15 1355.59,427.15 1362.02,420.72 1362.02,414.28 1351.49,403.75 1351.49,397.31 1357.92,390.88 1364.36,390.88 1374.89,401.41 1381.33,401.41 1387.76,394.98 1387.76,388.55 1377.22,378.01 1377.22,371.57 1383.66,365.14 1390.09,365.14 1400.63,375.68 1407.06,375.68 1426.01,356.73 1513.96,356.73 1518.51,352.18 1518.51,339.51 1523.06,334.96 1532.16,334.96 1536.71,339.51 1536.71,352.18 1541.26,356.73 1550.36,356.73 1554.91,352.18 1554.91,339.51 1559.46,334.96 1568.56,334.96 1573.11,339.51 1573.11,352.18 1577.66,356.73 1586.76,356.73 1591.31,352.18 1591.31,339.51 1595.86,334.96 1604.96,334.96 1609.51,339.51 1609.51,352.18 1614.06,356.73 1623.16,356.73 1627.71,352.18 1627.71,339.51 1632.26,334.96 1641.36,334.96 1645.91,339.51 1645.91,352.18 1650.46,356.73 1674.01,356.73 1696.26,378.98 1696.26,395.88 1700.81,400.43 1727.71,400.43 1732.26,404.98 1732.26,414.08 1727.71,418.63 1700.81,418.63 1696.26,423.18 v1(1696.26,441.57) ; 1078.23,197.73 1085.01,190.96 ; 1094.01,216.23 1063.01,216.23 ; v1(1101.1,550.1) 1085.4,534.4 1085.4,497.34 1105.01,477.73 1333.01,477.73 1345.32,465.42 1351.75,465.42 1365.64,479.31 1372.07,479.31 1378.51,472.87 1378.51,466.44 1364.62,452.55 1364.62,446.12 1371.06,439.68 1377.49,439.68 1391.38,453.57 1397.81,453.57 1404.24,447.13 1404.24,440.7 1390.36,426.82 1390.36,420.38 1396.79,413.95 1403.23,413.95 1417.11,427.83 1423.55,427.83 1429.98,421.4 1429.98,414.96 1416.1,401.08 1416.1,394.64 1432.01,378.73 1501.56,378.73 1506.11,383.28 1506.11,438.18 1510.66,442.73 1526.01,442.73 1532.01,436.73 1532.01,382.73 1536.01,378.73 1596.01,378.73 1604.01,386.73 1604.01,439.73 1610.01,445.73 1637.01,445.73 1642.01,440.73 1642.01,383.73 1646.01,379.73 1664.01,379.73 1680.51,396.23 1680.51,457.32 v1(1664.76,473.07) ; v1(1101.1,612.9) 1114,625.8 1114,653 1107,660 1055.28,660 1046.01,650.73 1046.01,604.73 1053.54,597.2 1205.54,597.2 1211.01,591.73 1211.01,566.73 1234.01,543.73 1309.01,543.73 1328.01,562.73 1450.01,562.73 1460.01,552.73 1511.01,552.73 1528.01,535.73 1640.6,535.73 1656.01,520.32 1749.16,520.32 1753.71,515.77 1753.71,486.87 1758.26,482.32 1767.36,482.32 1771.91,486.87 1771.91,515.77 1776.46,520.32 1793.42,520.32 1801.01,512.73 1801.01,468.73 1792.01,459.73 1738.01,459.73 1727.76,469.98 v1(1727.76,504.57) v1@1725.01,501.82 ; 1121.22,154.74 1085.01,190.96 ; 1126.01,230.48 1096.01,230.48 ; v1(1132.5,581.5) 1122.78,581.5 1116.8,575.52 1116.8,568.94 1120.01,565.73 1144.01,565.73 1148.2,561.54 1148.2,539.92 1142.68,534.4 1122.68,534.4 1116.8,528.52 1116.8,508.94 1128.01,497.73 1191.56,497.73 1196.11,502.28 1196.11,507.18 1200.66,511.73 1209.76,511.73 1214.31,507.18 1214.31,502.28 1218.86,497.73 1227.96,497.73 1232.51,502.28 1232.51,507.18 1237.06,511.73 1246.16,511.73 1250.71,507.18 1250.71,502.28 1255.26,497.73 1264.36,497.73 1268.91,502.28 1268.91,507.18 1273.46,511.73 1282.56,511.73 1287.11,507.18 1287.11,502.28 1291.66,497.73 1300.76,497.73 1305.31,502.28 1305.31,507.18 1309.86,511.73 1318.96,511.73 1323.51,507.18 1323.51,502.28 1328.06,497.73 1347.56,497.73 1352.11,502.28 1352.11,527.18 1356.66,531.73 1365.76,531.73 1370.31,527.18 1370.31,502.28 1374.86,497.73 1383.96,497.73 1388.51,502.28 1388.51,527.18 1393.06,531.73 1402.16,531.73 1406.71,527.18 1406.71,502.28 1411.26,497.73 1439.56,497.73 1444.11,502.28 1444.11,515.18 1448.66,519.73 1457.76,519.73 1462.31,515.18 1462.31,502.28 1466.86,497.73 1500.01,497.73 1508.92,488.82 1523.56,488.82 1528.11,493.37 1528.11,512.27 1532.66,516.82 1541.76,516.82 1546.31,512.27 1546.31,479.37 1550.86,474.82 1559.96,474.82 1564.01,478.87 1564.01,479.73 1564.51,480.23 1564.51,512.27 1569.06,516.82 1578.16,516.82 1582.71,512.27 1582.71,479.37 1587.26,474.82 1596.36,474.82 1600.91,479.37 1600.91,512.27 1605.46,516.82 1614.56,516.82 1619.11,512.27 1619.11,477.63 1626.01,470.73 1634.01,470.73 1652.1,488.82 1691.1,488.82 1696.26,493.98 v1(1696.26,504.57) ; v1(1163.9,581.5) 1179.6,565.8 1179.6,539.73 1191.6,527.73 1321.01,527.73 1341.01,547.73 1435.01,547.73 1446.01,536.73 1474.01,536.73 1484.01,526.73 v1(1484.01,514.01) ; v1(1163.9,675.7) 1148.2,691.4 1148.2,748.92 1187.61,788.33 1273.4,788.33 1280.73,781 1349.28,781 1367.01,798.73 1802.27,798.73 1853.74,747.26 v1(1853.74,725.03) ; v1(1163.9,707.1) 1179.6,722.8 1241.01,722.8 1254.94,736.73 1281.76,736.73 1286.31,732.18 1286.31,728.06 1290.86,723.51 1299.96,723.51 1304.51,728.06 1304.51,732.18 1309.06,736.73 1377.01,736.73 1383.01,742.73 1383.01,758.73 1389.01,764.73 1436.76,764.73 1441.31,760.18 1441.31,751.28 1445.86,746.73 1454.96,746.73 1459.51,751.28 1459.51,760.18 1464.06,764.73 1473.16,764.73 1477.71,760.18 1477.71,751.28 1482.26,746.73 1491.36,746.73 1495.91,751.28 1495.91,760.18 1500.46,764.73 1549.76,764.73 1554.31,760.18 1554.31,751.28 1558.86,746.73 1567.96,746.73 1572.51,751.28 1572.51,760.18 1577.06,764.73 1586.16,764.73 1590.71,760.18 1590.71,751.28 1595.26,746.73 1604.36,746.73 1608.91,751.28 1608.91,760.18 1613.46,764.73 1632.01,764.73 1655.95,740.79 1747.56,740.79 1752.11,745.34 1752.11,750.24 1756.66,754.79 1765.76,754.79 1770.31,750.24 1770.31,745.34 1774.86,740.79 1806.49,740.79 v1(1822.24,725.03) ; v1(1163.9,738.5) 1179.6,754.2 1348.48,754.2 1377.01,782.73 1784.01,782.73 1790.74,776 v1(1790.74,756.53) ; 1165.74,273.23 1149.01,273.23 ; v1(1195.3,675.7) 1211,691.4 1266.68,691.4 1279.01,703.73 1312.73,703.73 1325,716 1379.28,716 1391.01,727.73 1546.76,727.73 1551.31,723.18 1551.31,714.78 1555.86,710.23 1564.96,710.23 1569.51,714.78 1569.51,723.18 1574.06,727.73 1583.16,727.73 1587.71,723.18 1587.71,714.78 1592.26,710.23 1601.36,710.23 1605.91,714.78 1605.91,723.18 1610.46,727.73 1624.57,727.73 1643.01,709.29 1741.01,709.29 1754.45,722.73 1799.57,722.73 1813.01,709.29 1832.45,709.29 1837.99,703.75 1837.99,677.8 v1(1853.74,662.04) ; 1199.96,154.74 1138.47,216.23 1063.01,216.23 ; v1(1226.71,612.9) 1226.71,575.03 1240.01,561.73 1270.01,561.73 1289.01,580.73 1365.01,580.73 1387.01,602.73 1404,602.73 1409,597.73 1880.01,597.73 1900.98,618.7 1900.98,709.3 v1(1885.24,725.04) ; v1(1226.71,644.3) 1201.3,644.3 1185.6,628.6 1152.14,628.6 1143.01,637.73 1143.01,653.73 1149.28,660 1304,660 1326,638 1346,638 1393,685 1469,685 1476.2,677.8 1736.8,677.8 1752.54,693.54 v1(1822.24,693.54) ; v1(1258.1,581.5) 1256.32,579.73 1245.01,579.73 1241.01,583.73 1241.01,591.73 1245.01,595.73 1355.01,595.73 1379.6,620.32 1406.68,620.32 1416,611 1478,611 1497.73,630.73 1555.16,630.73 1559.71,626.18 1559.71,619.28 1564.26,614.73 1573.36,614.73 1577.91,619.28 1577.91,626.18 1582.46,630.73 1637.01,630.73 1654.01,613.73 1777.26,613.73 1782.26,618.73 1796.27,618.73 1804.27,610.73 1858.01,610.73 1869.49,622.21 1869.49,704.25 1865.01,708.73 1857.01,708.73 1853.74,705.46 v1(1853.74,693.54) ; v1@1259.92,614.73 v1(1258.1,612.9) 1247.1,612.9 1243,617 1243,622 1249,628 1268.92,628 1283.65,642.73 1292.75,642.73 1297.3,638.18 1297.3,613.7 1301,610 1348,610 1386,648 1433,648 1441,656 1441,666 1445,670 1456,670 1461,665 1461,653 1466,648 1473,648 1487.04,662.04 1752.55,662.04 ; 1278.7,165.04 1213.26,230.48 1096.01,230.48 ; v1(1420.88,630.24) 1477.24,630.24 1493.73,646.73 1787.27,646.73 1803.46,630.54 v1(1853.74,630.54) ; 1430.01,1499.73 1439.01,1499.73 1442.01,1496.73 ; v1@1483.4,513.4 v1@1484.01,512.79 ; 1514.92,76 1480.01,110.91 1480.01,179.73 1438.01,221.73 1328.01,221.73 1276.51,273.23 1149.01,273.23 ; v1(1548.29,567.56) 1564.46,583.73 1727.01,583.73 1755.76,583.73 1760.31,579.18 1760.31,567.57 1764.86,563.02 1773.96,563.02 1778.51,567.57 1778.51,579.18 1783.06,583.73 1792.16,583.73 1796.71,579.18 1796.71,567.57 1801.26,563.02 1810.36,563.02 1814.91,567.57 1814.91,579.18 1819.46,583.73 1824.01,583.73 1837.57,583.73 v1(1853.74,567.56) ; 1753,662.04 1752.55,662.04 ; v1(1779,1299) 1779.27,1298.73 1833.01,1298.73 1857.01,1274.73 v1(1857.01,1108.47) ; v1(1822.24,662.04) 1822.24,651.24 1818,647 1808,647 1792.96,662.04 1779.85,662.04 1775.3,666.59 1775.3,675.49 1770.75,680.04 1761.65,680.04 1757.1,675.49 1757.1,666.59 1752.55,662.04 ; 487.21,503.73 487.21,698.73 ; 502.81,507.73 502.81,692.73
  ART04 w5: 972,558.83 989.61,576.44 989.61,616.19